# Altium PCB PCB_Irrigatore_01_2023-07-30.pcbdoc
Units mil, origin at the board's own origin, x right, y up, seen from the top; angles counter-clockwise.
Board outline 8461.35 x 7981.9 mil, 2 copper layers (Top Layer, Bottom Layer); 38 components, 53 nets, 248 pads, 0 vias.
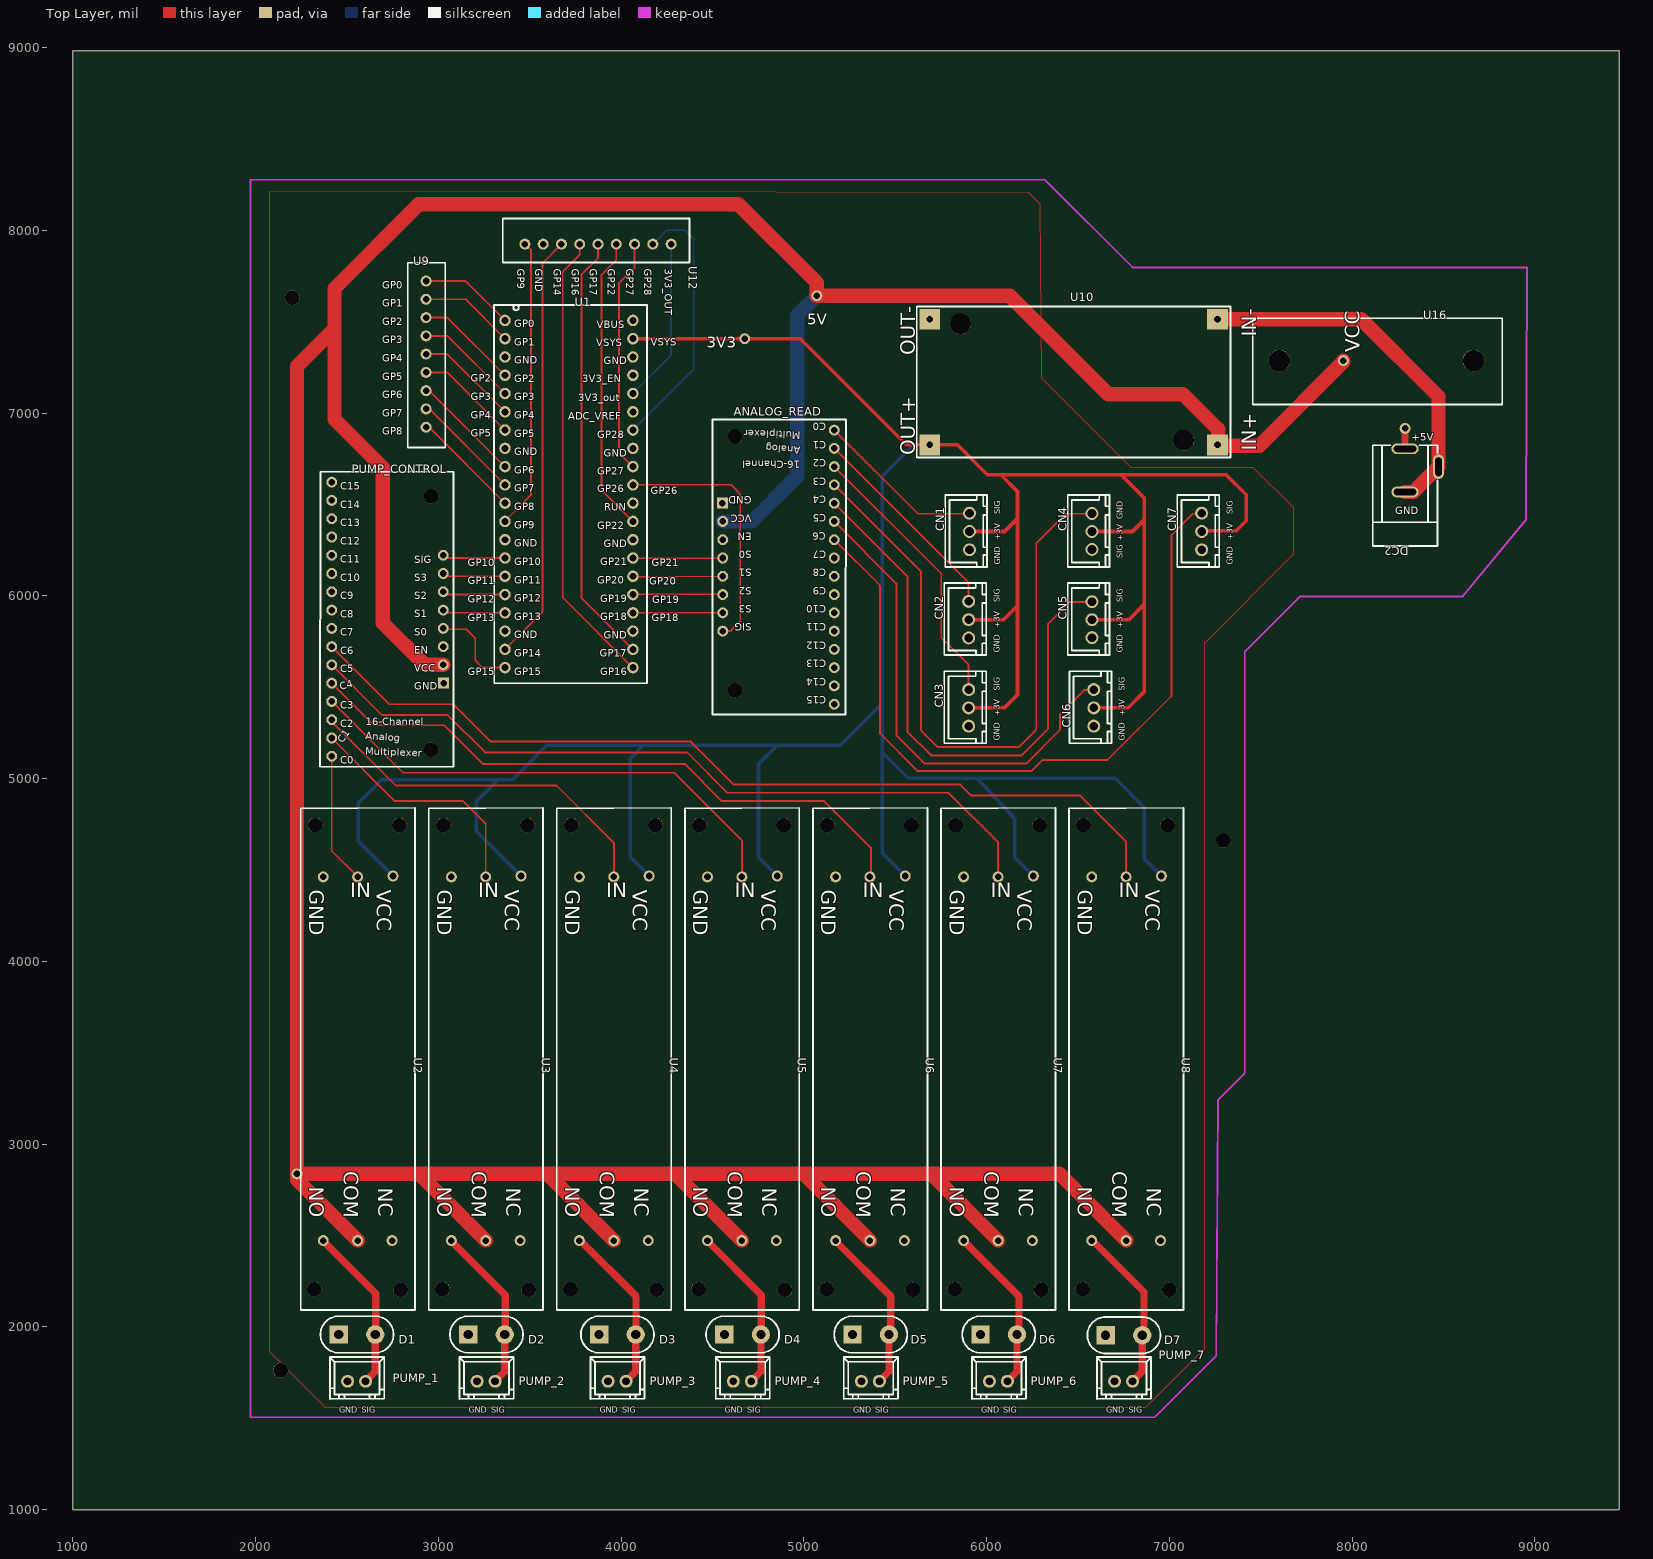
[diagram p0: Top Layer view]
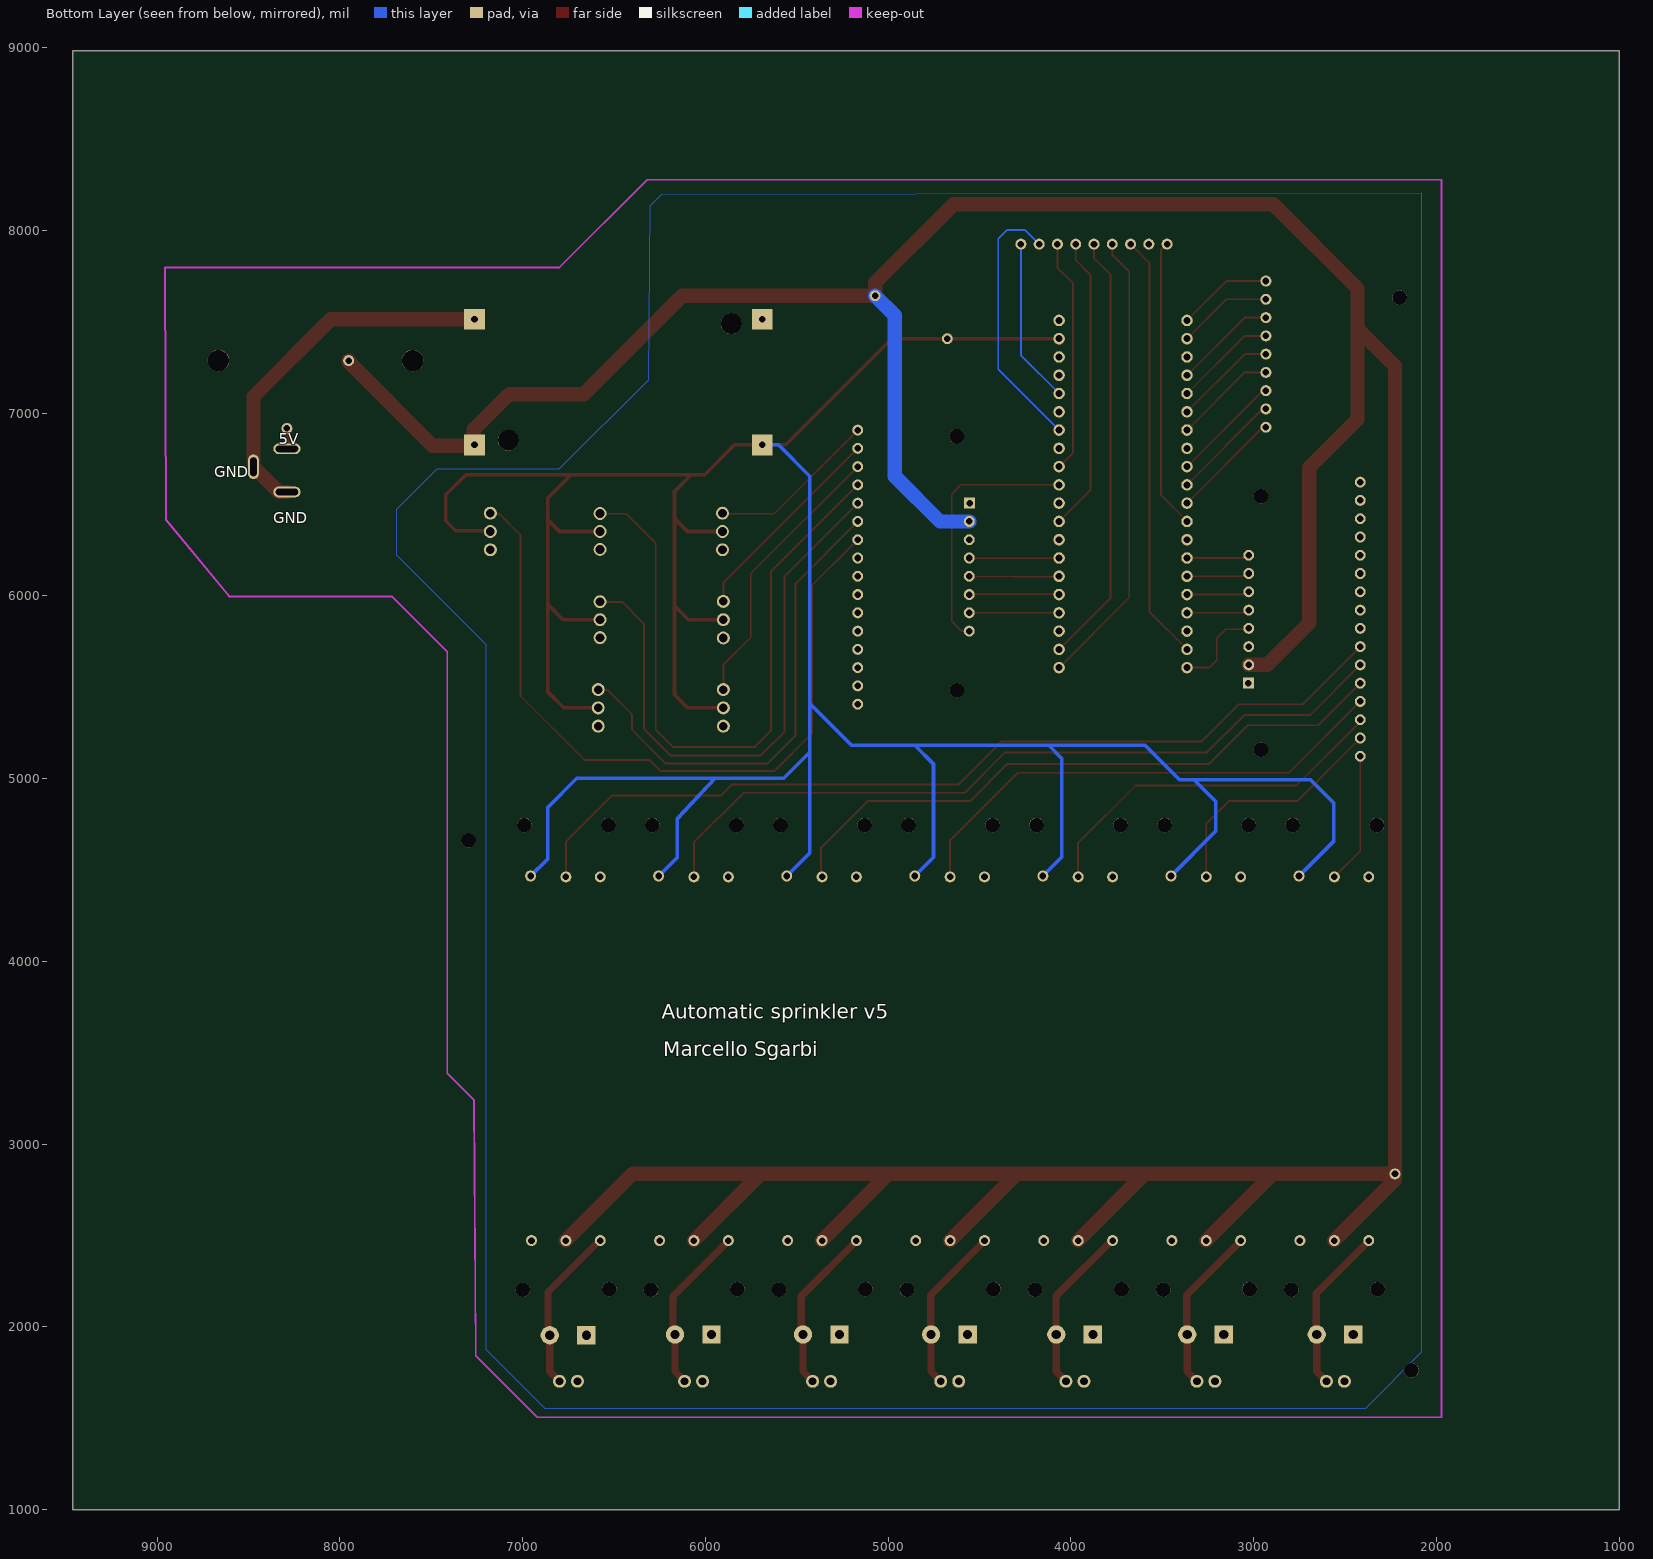
[diagram p1: Bottom Layer view, seen from below]

## Layer stack, top to bottom
Top Layer: signal copper (thickness not stored)
Dielectric: dielectric 12.6, FR-4, Dk 4.8
Bottom Layer: signal copper (thickness not stored)

## Board outline
9461.35,1000 1000,1000 1000,8981.9 9461.35,8981.9

## Components (designator, comment, footprint, x,y, rotation, side; value= is the part's Value field where it differs from the comment)
ANALOG_READ "16 - Cahnnel analog multiplexer" "16 CHANNEL ANANLOG MUX" 5166.65,5406.8 r180 top
CN1 "Signal_1" CONN-TH_XH-3A_2_54MM 5906.65,6351.8 r90 top
CN2 "Signal_2" CONN-TH_XH-3A_2_54MM 5901.65,5869.3 r90 top
CN3 "Signal_3" CONN-TH_XH-3A_2_54MM 5901.65,5386.8 r90 top
CN4 "Signal_4" CONN-TH_XH-3A 6576.65,6351.8 r90 top
CN5 "Signal_5" CONN-TH_XH-3A 6576.65,5869.3 r90 top
CN6 "Signal_6" CONN-TH_XH-3A_2_54MM 6586.65,5386.8 r90 top
CN7 "Signal_7" CONN-TH_XH-3A_2_54MM 7176.65,6351.8 r90 top
D1 "JP-DIODO-04" JP-DIODO-03 2554.75,1957.79 r180 top
D2 "JP-DIODO-04" JP-DIODO-03 3263.41,1957.79 r180 top
D3 "JP-DIODO-04" JP-DIODO-03 3979.95,1957.79 r180 top
D4 "JP-DIODO-04" JP-DIODO-03 4664.99,1957.79 r180 top
D5 "JP-DIODO-04" JP-DIODO-03 5365.77,1957.79 r180 top
D6 "JP-DIODO-04" JP-DIODO-03 6066.56,1957.79 r180 top
D7 "JP-DIODO-04" JP-DIODO-03 6751.6,1953.85 r180 top
DC2 "KH-DC-005B-2.0-Switch" DC-IN-TH_DC-005B-13A-SWITCH 8381.5,6686.1 r180 top
PUMP_1 "XH-2A_C9900014608" CONN-TH_XH-2A 2552.79,1701.88 r0 top
PUMP_2 "XH-2A_C9900014608" CONN-TH_XH-2A 3261.45,1701.88 r0 top
PUMP_3 "XH-2A_C9900014608" CONN-TH_XH-2A 3977.98,1701.88 r0 top
PUMP_4 "XH-2A_C9900014608" CONN-TH_XH-2A 4663.02,1701.88 r0 top
PUMP_5 "XH-2A_C9900014608" CONN-TH_XH-2A 5363.81,1701.88 r0 top
PUMP_6 "XH-2A_C9900014608" CONN-TH_XH-2A 6064.59,1701.88 r0 top
PUMP_7 "XH-2A_C9900014608" CONN-TH_XH-2A 6749.63,1701.88 r0 top
PUMP_CONTROL "16 - Cahnnel analog multiplexer" "16 CHANNEL ANANLOG MUX" 2416.65,6621.8 r0 top
U1 "RaspberryPI PicoW 2022" RASPERRYPI_PICOW_2022 3336.65,7506.8 r0 top
U2 "3V realy module" "3V MODULE FOOTPRINT" 2746.65,4461.8 r270 top
U3 "3V realy module" "3V MODULE FOOTPRINT" 3447.45,4461.8 r270 top
U4 "3V realy module" "3V MODULE FOOTPRINT" 4148.35,4461.8 r270 top
U5 "3V realy module" "3V MODULE FOOTPRINT" 4849.15,4461.8 r270 top
U6 "3V realy module" "3V MODULE FOOTPRINT" 5549.95,4461.8 r270 top
U7 "3V realy module" "3V MODULE FOOTPRINT" 6250.85,4461.8 r270 top
U8 "3V realy module" "3V MODULE FOOTPRINT" 6951.65,4461.8 r270 top
U9 "1x9_extra_pins" "GP0-GP8 1X9 EXTRA PINS" 2932.71,6922.35 r0 top
U10 "LM2596 Buck Converter" "LM2596 BUCK CONVERTER" 5688.65,7512.9 r0 top
U12 "1x9 extra right side" "1X9 FOOTPRINT RIGHT" 3452.39,8064.08 r270 top
U16 "Switch 3A 5V" "SWITCH 3A" 7601.65,7286.8 r0 top
? "" ? 1973.14,4892.82 r0 top
? "" ? 5464.2,8146 r0 top

## Footprints (in the part's own frame and the unit in brackets; to place one, negate y for a bottom-side part, rotate by r counter-clockwise, add the part's x,y. Pads: shape width x height; smd on the part's side, far side on the other; paste and mask are expansions set on the pad)
"1X9 FOOTPRINT RIGHT" [mil]
  round 60 hole 36 paste+0 mask+2: 10(140,21.25) 11(140,121.25) 12(140,221.25) 13(140,321.25) 14(140,421.25) 15(140,521.25) 16(140,621.25) 17(140,721.25) 18(140,821.25)
  silkscreen extent 0,-100 240,921
"3V MODULE FOOTPRINT" [mil]
  round 60 hole 36 paste+0 mask+2: 1(-5,5) 2(0,-188.19) 3(0,-376.38) 4(1989.88,-376.38) 5(1989.88,-188.19) 6(1989.88,0)
  round 80 hole 80 unplated paste+0: ""(-283.46,39.37) ""(-283.46,-421.26) ""(2255.9,-425.2) ""(2259.84,47.24)
  silkscreen extent -378,-500 2370,126
"16 CHANNEL ANANLOG MUX" [mil]
  round 60 hole 36 paste+0 mask+2: 1(0,0) 2(0,-100) 3(0,-200) 4(0,-300) 5(0,-400) 6(0,-500) 7(0,-600) 8(0,-700) 9(0,-800) 10(0,-900) 11(0,-1000) 12(0,-1100) 13(0,-1200) 14(0,-1300) 15(0,-1400) 16(0,-1500) 18(610.23,-1000) 19(610.23,-900) 20(610.23,-800) 21(610.23,-700) 22(610.23,-600) 23(610.23,-500) 24(610.23,-400)
  rect 60x60 hole 36 paste+0 mask+2: 17(612.23,-1100)
  round 80 hole 80 unplated paste+0: ""(543.31,-76.77) ""(543.31,-1464.56)
  silkscreen extent -63,-1557 667,57
CONN-TH_XH-2A [mm]
  round 1.8 hole 1.1 paste+0 mask+0.051: 1(-1.251,0) 2(1.251,0)
  silkscreen extent -3.69,-2.45 3.83,3.35
CONN-TH_XH-3A [mm]
  round 1.8 hole 1.2 paste+0 mask+0.05: 1(-2.5,0) 2(0,0) 3(2.5,0)
  silkscreen extent -4.92,-2.44 5.09,3.38
CONN-TH_XH-3A_2_54MM [mm]
  round 1.8 hole 1.2 paste+0 mask+0.05: 1(-2.54,0) 2(0,0) 3(2.54,0)
  silkscreen extent -4.92,-2.44 5.09,3.38
DC-IN-TH_DC-005B-13A-SWITCH [mm]
  oval 3.8x1.5 hole 0.9 slot 3.1 at 0 deg paste+0 mask+0.051: 1(2.325,-3.001) 2(2.325,2.999)
  oval 1.5x3.4 hole 0.9 slot 2.6 at 90 deg paste+0 mask+0.051: 3(-2.325,-0.5)
  round 1.524 hole 0.914 paste+0 mask+0.051: 4(2.325,-5.842)
  silkscreen extent -2.17,-3.5 6.83,10.5
"GP0-GP8 1X9 EXTRA PINS" [mil]
  round 60 hole 36 paste+0 mask+2: 1(0,800) 2(0,700) 3(0,600) 4(0,500) 5(0,400) 6(0,300) 7(0,200) 8(0,100) 9(0,0)
  silkscreen extent -100,-111 105,900
JP-DIODO-03 [mil]
  rect 100x100 hole 50 paste+0 mask+4: 1(100,0)
  round 100 hole 50 paste+0 mask+4: 2(-100,0)
  silkscreen extent -200,-100 200,100
"LM2596 BUCK CONVERTER" [mm]
  rect 2.9x2.9 hole 0.914 paste+0 mask+0.051: 1(40,-17.45) 2(40,0) 3(0,0) 4(0,-17.45)
  round 2.9 hole 2.9 unplated paste+0: ""(4.3,-0.6) ""(35.3,-16.8)
  silkscreen extent -1.8,-19.2 41.8,1.8
RASPERRYPI_PICOW_2022 [mm]
  round 1.6 hole 0.96 paste+0 mask+0.051: 1(0.71,0) 2(0.71,-2.54) 3(0.71,-5.08) 4(0.71,-7.62) 5(0.71,-10.16) 6(0.71,-12.7) 7(0.71,-15.24) 8(0.71,-17.78) 9(0.71,-20.32) 10(0.71,-22.86) 11(0.71,-25.4) 12(0.71,-27.94) 13(0.71,-30.48) 14(0.71,-33.02) 15(0.71,-35.56) 16(0.71,-38.1) 17(0.71,-40.64) 18(0.71,-43.18) 19(0.71,-45.72) 20(0.71,-48.26) 21(18.49,-48.26) 22(18.49,-45.72) 23(18.49,-43.18) 24(18.49,-40.64) 25(18.49,-38.1) 26(18.49,-35.56) 27(18.49,-33.02) 28(18.49,-30.48) 29(18.49,-27.94) 30(18.49,-25.4) 31(18.49,-22.86) 32(18.49,-20.32) 33(18.49,-17.78) 34(18.49,-15.24) 35(18.49,-12.7) 36(18.49,-10.16) 37(18.49,-7.62) 38(18.49,-5.08) 39(18.49,-2.54) 40(18.49,0)
  silkscreen extent -0.8,-50.44 20.47,2.16
"SWITCH 3A" [mm]
  round 1.524 hole 0.914 paste+0 mask+0.051: 1(8.9,0)
  round 3 hole 3 unplated paste+0: ""(0,0) ""(27,0)
  silkscreen extent -3.7,-6.1 31,5.9
? [mil]

## Free pads (board coordinates)
  round 60 hole 36 paste+0 mask+2: 2(5071.65,7641.8) 3(2226.65,2836.8) 4(4676.3,7406.8)
  round 80 hole 80 unplated paste+0: ""(2136.65,1761.8) ""(2200.43,7631.01) ""(7296.65,4661.8)

## Nets (pads, with @x,y where several pads share a name; then routed paths per layer and width w, separated by ;. In a path a pad name is that pad's centre, name@x,y a point inside that pad or via, vN(x,y) a via of type N, cw(c..) or ccw(c..) an arc to the next point about the centre after c; other vN are vias at no path point)
+3V3: CN1.2 CN2.2 CN3.2 CN4.2 CN5.2 CN6.2 CN7.2 pad.4 U1.39 U2.1 U3.1 U4.1 U5.1 U6.1 U7.1 U8.1 U10.4 | length 19480.3
  Top Layer w20: U1.39@4064.55,7406.8 pad.4 4979.75,7406.8 5560.65,6825.9 U10.4 ; U10.4 5840.18,6825.89 6003.57,6662.5 7310.65,6662.5 7420.89,6552.27 7420.89,6410.54 7365.77,6355.42 7180.28,6355.42 CN7.2 ; CN3.2 6097.93,5386.79 6168.92,5457.78 6168.92,6570.31 6076.73,6662.5 ; CN2.2 6092.24,5869.29 6168.92,5945.97 ; CN1.2 6097.7,6351.79 6168.92,6423.01 ; CN5.2 6779.23,5869.29 6861.83,5951.89 ; CN4.2 6798.57,6351.79 6861.83,6415.05 ; CN6.2 6775.09,5386.79 6861.83,5473.53 6861.83,6536.52 6735.85,6662.5
  Bottom Layer w20: U2.1 2562.63,4655.82 2562.63,4867.23 2688.61,4993.22 3405.15,4993.22 3594.12,5182.19 5200.42,5182.19 5428.76,5410.54 ; 3329.05,4993.2 3326.45,4993.2 3208.35,4875.1 3208.35,4711 U3.1 ; 4124.05,5182.2 4121.65,5182.2 4050.85,5111.3 4050.85,4569.3 U4.1 ; U5.1 4751.65,4569.3 4751.65,5079.8 4853.95,5182.2 4859.05,5182.2 ; 5428.75,5143.5 5571.25,5001.1 6704.35,5001.1 6861.85,4843.6 6861.85,4561.6 U8.1 ; U6.1 5428.76,4592.98 5428.76,5410.54 ; U10.4 5600.02,6825.89 5428.76,6654.63 5428.76,5410.54 ; 5947.05,5001.1 6153.15,4780.9 6153.15,4569.5 U7.1
+5V: ANALOG_READ.18 pad.2 pad.3 PUMP_CONTROL.18 U2.5 U3.5 U4.5 U5.5 U6.5 U7.5 U8.5 U10.1 U16.1 | length 22935
  Top Layer w78.74: 2431.65,7460.5 2226.65,7255.5 pad.3 ; U2.5 2226.65,2803.73 pad.3 ; 2897.79,2836.8 2897.79,2833.42 U3.5 ; PUMP_CONTROL.18@3026.85,5621.8 2926.15,5621.8 2696.65,5851.3 2696.65,6701.8 2431.65,6966.8 2431.65,7681.1 2893.35,8142.8 4641.35,8142.8 5071.65,7712.5 pad.2 6126.63,7641.8 6664.98,7103.45 7074.43,7103.45 7266.65,6911.23 7266.65,6821.8 7493.55,6821.8 7952.05,7280.3 U16.1 ; 3592.52,2836.8 3595.24,2836.8 U4.5@3960.12,2471.92 ; 4297.79,2836.8 4297.79,2835.09 U5.5 ; 4997.75,2836.8 U6.5@5361.75,2471.9 ; 5697.75,2836.8 U7.5@6062.65,2471.9 ; U8.5 6398.58,2836.8 pad.3
  Bottom Layer w78.74: ANALOG_READ.18 4716.35,6406.8 4964.25,6654.6 4964.25,7534.4 pad.2
+IN: DC2.1 DC2.4 | length 111.9
  Top Layer w39.37: DC2.1 DC2.4
GND: ANALOG_READ.17 ANALOG_READ.19 CN1.1 CN2.1 CN3.1 CN4.1 CN5.1 CN6.1 CN7.1 D1.1 D2.1 D3.1 D4.1 D5.1 D6.1 D7.1 PUMP_1.1 PUMP_2.1 PUMP_3.1 PUMP_4.1 PUMP_5.1 PUMP_6.1 PUMP_7.1 PUMP_CONTROL.17 PUMP_CONTROL.19 U1.38 U2.3 U3.3 U4.3 U5.3 U6.3 U7.3 U8.3 U10.3 U12.11
GND5: DC2.2 DC2.3 U10.2 | length 1978.8
  Top Layer w78.74: U10.2 8050.85,7512.9 8473.05,7090.7 DC2.3@8473.05,6736.6 ; DC2.2 8335.25,6568 DC2.3
NETPORT1: PUMP_CONTROL.24 U1.14 | length 343.9
  Top Layer w10: PUMP_CONTROL.24@3026.85,6221.8 3041.85,6206.8 U1.14@3364.55,6206.8
NETPORT2: PUMP_CONTROL.23 U1.15 | length 343.9
  Top Layer w10: PUMP_CONTROL.23 3041.88,6106.8 U1.15
NETPORT3: PUMP_CONTROL.22 U1.16 | length 343.9
  Top Layer w10: PUMP_CONTROL.22 3041.88,6006.8 U1.16
NETPORT4: PUMP_CONTROL.21 U1.17 | length 343.9
  Top Layer w10: PUMP_CONTROL.21 3041.88,5906.8 U1.17
NETPORT5: PUMP_CONTROL.20 U1.20 | length 497.1
  Top Layer w10: PUMP_CONTROL.20 3031.88,5816.8 3151.65,5816.8 3201.65,5766.8 3201.65,5646.8 3241.65,5606.8 U1.20
NETPORT6: ANALOG_READ.20 U1.27 | length 497.7
  Top Layer w10: U1.27@4058.69,6205.81 ANALOG_READ.20
NETPORT7: ANALOG_READ.21 U1.26 | length 489.9
  Top Layer w10: U1.26@4066.56,6103.45 ANALOG_READ.21
NETPORT8: ANALOG_READ.22 U1.25 | length 489.9
  Top Layer w10: U1.25@4066.56,6008.96 ANALOG_READ.22
NETPORT9: ANALOG_READ.23 U1.24 | length 489.9
  Top Layer w10: U1.24@4066.56,5906.6 ANALOG_READ.23
NETPORT10: ANALOG_READ.24 U1.31 | length 1418.8
  Top Layer w10: U1.31@4066.56,6607.39 4601.65,6606.8 4651.65,6556.8 4651.65,5861.8 4596.65,5806.8 ANALOG_READ.24
NETPORT11: PUMP_CONTROL.16 U2.2 | length 718.7
  Top Layer w10: PUMP_CONTROL.16 2416.65,4603.61 U2.2
NETPORT12: PUMP_CONTROL.15 U3.2 | length 1328.1
  Top Layer w10: PUMP_CONTROL.15 2761.65,4876.8 3135.75,4876.8 3259.25,4753.2 U3.2@3259.25,4461.8
NETPORT13: PUMP_CONTROL.14 U4.2 | length 2016.1
  Top Layer w10: PUMP_CONTROL.14 2416.65,5311.8 2766.65,4961.8 3646.65,4961.8 3961.65,4646.8 3961.65,4463.32 U4.2@3960.12,4461.8
NETPORT14: PUMP_CONTROL.13 U5.2 | length 2759.5
  Top Layer w10: PUMP_CONTROL.13 2806.65,5031.8 4291.65,5031.8 4660.96,4662.49 U5.2
NETPORT15: PUMP_CONTROL.12 U6.2 | length 3484.8
  Top Layer w10: PUMP_CONTROL.12 2646.65,5291.8 3031.65,5291.8 3243.65,5079.8 4348.65,5079.8 4551.65,4876.8 5111.65,4876.8 5366.65,4621.8 5366.65,4466.7 U6.2@5361.75,4461.8
NETPORT16: PUMP_CONTROL.11 U7.2 | length 4237.2
  Top Layer w10: PUMP_CONTROL.11 2691.65,5346.8 3051.65,5346.8 3255.65,5142.8 4360.65,5142.8 4581.15,4922.3 5791.05,4922.3 6062.65,4650.8 U7.2@6062.65,4461.8
NETPORT17: PUMP_CONTROL.10 U8.2 | length 4981.9
  Top Layer w10: PUMP_CONTROL.10 2731.65,5406.8 3081.65,5406.8 3286.65,5201.8 4381.65,5201.8 4616.65,4966.8 5856.65,4966.8 5916.65,4906.8 6511.65,4906.8 6763.46,4654.99 U8.2
NETPORT18: D1.2 PUMP_1.2 U2.4 | length 911.7
  Top Layer w39.37: U2.4 2370.27,2469.05 2657.12,2182.2 2657.12,1960.15 D1.2 2654.75,1754.6 PUMP_1.2
NETPORT19: D2.2 PUMP_2.2 U3.4 | length 914.9
  Top Layer w39.37: U3.4 3071.07,2469.03 3365.78,2174.32 3365.78,1960.15 D2.2 3363.41,1754.6 PUMP_2.2
NETPORT20: D3.2 PUMP_3.2 U4.4 | length 924.3
  Top Layer w39.37: U4.4 3776.84,2471.92 4082.31,2166.45 4082.31,1960.15 D3.2 4079.95,1754.6 PUMP_3.2
NETPORT21: D4.2 PUMP_4.2 U5.4 | length 914.9
  Top Layer w39.37: U5.4 4472.77,2468.91 4767.35,2174.32 4767.35,1960.15 D4.2 4764.99,1754.61 PUMP_4.2
NETPORT22: D5.2 PUMP_5.2 U6.4 | length 921.4
  Top Layer w39.37: U6.4 5173.57,2468.89 5476.01,2166.45 5476.01,1968.03 D5.2 5465.77,1754.6 PUMP_5.2
NETPORT23: D6.2 PUMP_6.2 U7.4 | length 921.3
  Top Layer w39.37: U7.4 5874.47,2468.78 6176.79,2166.45 6176.79,1968.03 D6.2 6166.56,1754.6 PUMP_6.2
NETPORT24: D7.2 PUMP_7.2 U8.4 | length 917.6
  Top Layer w39.37: U8.4 6579.98,2471.92 6861.83,2190.07 6861.83,1964.09 D7.2 6851.6,1754.6 PUMP_7.2
NETPORT25: ANALOG_READ.16 CN1.3 | length 929.8
  Top Layer w10: ANALOG_READ.16 5624.75,6448.7 CN1.3@5906.65,6448.7
NETPORT26: ANALOG_READ.15 CN2.3 | length 1145
  Top Layer w10: ANALOG_READ.15 5901.65,6071.8 CN2.3@5901.65,5966.2
NETPORT27: ANALOG_READ.14 CN3.3 | length 1527.5
  Top Layer w10: ANALOG_READ.14 5751.65,6121.8 5751.65,5771.8 5901.65,5621.8 CN3.3@5901.65,5483.7
NETPORT28: ANALOG_READ.13 CN4.3 | length 3640.4
  Top Layer w10: ANALOG_READ.13 5641.65,6131.8 5641.65,5261.8 5731.65,5171.8 6176.65,5171.8 6271.65,5266.8 6271.65,6286.8 6433.55,6448.7 CN4.3@6576.65,6448.7
NETPORT29: ANALOG_READ.12 CN5.3 | length 3164.1
  Top Layer w10: ANALOG_READ.12 5566.65,6106.8 5566.65,5256.8 5696.65,5126.8 6191.65,5126.8 6336.65,5271.8 6336.65,5846.8 6456.05,5966.2 CN5.3@6576.65,5966.2
NETPORT30: ANALOG_READ.11 CN6.3 | length 2671.3
  Top Layer w10: ANALOG_READ.11 5506.65,6066.8 5506.65,5236.8 5661.65,5081.8 6216.65,5081.8 6401.65,5266.8 6401.65,5351.8 6533.55,5483.7 CN6.3@6586.65,5483.7
NETPORT31: ANALOG_READ.10 CN7.3 | length 4106.7
  Top Layer w10: ANALOG_READ.10 5416.65,6056.8 5416.65,5246.8 5621.65,5041.8 6246.65,5041.8 6306.65,5101.8 6661.65,5101.8 7011.65,5451.8 7011.65,6331.8 7128.55,6448.7 CN7.3@7176.65,6448.7
NETPORT32: U1.1 U9.1 | length 521.2
  Top Layer w10: U9.1 3149.05,7722.35 U1.1
NETPORT33: U1.2 U9.2 | length 521.2
  Top Layer w10: U9.2 3149.05,7622.35 U1.2
NETPORT34: U1.4 U9.3 | length 562.6
  Top Layer w10: U9.3 3049.05,7522.35 U1.4
NETPORT35: U1.5 U9.4 | length 562.6
  Top Layer w10: U9.4 3049.05,7422.35 U1.5
NETPORT36: U1.6 U9.5 | length 562.6
  Top Layer w10: U9.5 3049.05,7322.35 U1.6
NETPORT37: U1.7 U9.6 | length 562.6
  Top Layer w10: U9.6 3049.05,7222.35 U1.7
NETPORT38: U1.9 U9.7 | length 604
  Top Layer w10: U9.7 2949.05,7122.35 U1.9
NETPORT39: U1.10 U9.8 | length 604
  Top Layer w10: U9.8 2949.05,7022.35 U1.10
NETPORT40: U1.11 U9.9 | length 604
  Top Layer w10: U9.9 2949.05,6922.35 U1.11
NETPORT41: U1.12 U12.10 | length 1590.5
  Top Layer w10: U1.12 3364.6,6409.36 3507.51,6552.27 3507.51,7890.21 U12.10
NETPORT42: U1.19 U12.12 | length 2345.3
  Top Layer w10: U1.19 3570.5,5912.7 3570.5,7820.94 U12.12
NETPORT43: U1.21 U12.13 | length 2514.8
  Top Layer w10: U12.13 3773.64,7865.64 3680.74,7772.74 3680.74,5990.66 U1.21
NETPORT44: U1.22 U12.14 | length 2371.4
  Top Layer w10: U12.14 3873.64,7847.53 3783.1,7756.99 3783.1,5988.3 U1.22
NETPORT45: U1.29 U12.15 | length 1621.5
  Top Layer w10: U12.15 3973.64,7837.3 3893.33,7756.99 3893.33,6578.06 U1.29
NETPORT46: U1.32 U12.16 | length 1284.6
  Top Layer w10: U1.32 3987.82,6783.57 3987.82,7709.75 4073.64,7795.56 U12.16
NETPORT47: U1.34 U12.17 | length 1459.9
  Bottom Layer w10: U1.34@4064.55,6906.8 4397.25,7239.5 4397.25,7953.8 4349.95,8001.1 4250.65,8001.1 U12.17
NETPORT48: U1.36 U12.18 | length 903.9
  Bottom Layer w10: U1.36 4273.64,7315.84 U12.18
pads on no net: ANALOG_READ. ANALOG_READ.1 ANALOG_READ.2 ANALOG_READ.3 ANALOG_READ.4 ANALOG_READ.5 ANALOG_READ.6 ANALOG_READ.7 ANALOG_READ.8 ANALOG_READ.9 PUMP_CONTROL. PUMP_CONTROL.1 PUMP_CONTROL.2 PUMP_CONTROL.3 PUMP_CONTROL.4 PUMP_CONTROL.5 PUMP_CONTROL.6 PUMP_CONTROL.7 PUMP_CONTROL.8 PUMP_CONTROL.9 U1.3 U1.8 U1.13 U1.18 U1.23 U1.28 U1.30 U1.33 U1.35 U1.37 U1.40 U2. U2.6 U3. U3.6 U4. U4.6 U5. U5.6 U6. U6.6 U7. U7.6 U8. U8.6 U10. U16.

## Polygon pours and split planes (outlines as drawn)
GND on Bottom Layer (solid): 2082.31,8205.81 2082.31,1859.36 2389.4,1552.28 6877.58,1552.28 7200.41,1875.11 7200.41,5733.37 7688.6,6221.56 7688.6,6473.53 7468.13,6694 6798.84,6694 6310.65,7182.19 6302.78,8134.94 6239.79,8197.93
GND on Top Layer (solid): 2074.44,8213.68 2074.44,1867.24 2381.53,1560.15 6869.71,1560.15 7192.54,1882.99 7192.54,5741.25 7680.73,6229.43 7680.73,6481.4 7460.26,6701.87 6790.97,6701.87 6302.78,7190.06 6294.9,8142.82 6231.91,8205.81

## Silkscreen, mask and mechanical layers (free items; w line width, h text height)
Top Overlay:
  text "5V" at 5019.32,7483.37 h59.05
  text "VSYS" at 4161.05,7367.23 h39.37
  text "3V3" at 4468.14,7357.38 h59.05
  text "GP2" at 3176.8,7170.38 h39.37
  text "GP3" at 3176.74,7070.24 h39.37
  text "GP4" at 3176.79,6970.1 h39.37
  text "GP5" at 3176.74,6869.97 h39.37
  text "+5V" at 8326.4,6847.55 h39.37
  text "GP26" at 4161.05,6556.2 h39.37
  text "GND" at 8235.86,6445.97 h39.37
  text "GP10" at 3161.06,6162.51 h39.37
  text "GP21" at 4168.93,6162.51 h39.37
  text "GP11" at 3161.11,6062.28 h39.37
  text "GP20" at 4152.79,6059.76 h39.37
  text "GP12" at 3161.04,5962.1 h39.37
  text "GP19" at 4170.5,5959.36 h39.37
  text "GP13" at 3161.04,5861.85 h39.37
  text "GP18" at 4168.93,5860.94 h39.37
  text "GP15" at 3161.06,5564.09 h39.37
Bottom Overlay:
  text "5V" at 8334.27,6829.82 h59.05
  text "GND" at 8688.6,6648.72 h59.05
  text "GND" at 8365.77,6396.75 h59.05
  text "Automatic sprinkler v5" at 6239.79,3685.5 h80
  text "Marcello Sgarbi" at 6231.92,3480.78 h80

## Text inside footprints (layer, text, board x,y; h text height)
ANALOG_READ: Top Overlay "16-Channel" at 4981.61,6738.3 h39.37 r180; Top Overlay "Analog" at 4982.98,6814.68 h39.37 r176; Top Overlay "Multiplexer" at 4982.29,6898.12 h39.37 r178; Top Overlay "C15" at 5121.36,5448.93 h39.37 r180; Top Overlay "C14" at 5121.32,5548.74 h39.37 r180; Top Overlay "C13" at 5121.32,5648.65 h39.37 r180; Top Overlay "C12" at 5121.32,5748.47 h39.37 r180; Top Overlay "C11" at 5121.35,5848.4 h39.37 r180; Top Overlay "C10" at 5121.32,5948.26 h39.37 r180; Top Overlay "C9" at 5121.38,6048.03 h39.37 r180; Top Overlay "C8" at 5121.34,6147.82 h39.37 r180; Top Overlay "C7" at 5121.39,6247.66 h39.37 r180; Top Overlay "C6" at 5120.63,6347.41 h39.37 r182; Top Overlay "C5" at 5121.31,6447.26 h39.37 r180; Top Overlay "C4" at 5121.33,6547.1 h39.37 r180; Top Overlay "C3" at 5121.37,6646.91 h39.37 r180; Top Overlay "C2" at 5121.37,6746.77 h39.37 r180; Top Overlay "C1" at 5121.4,6846.7 h39.37 r180; Top Overlay "C0" at 5121.33,6946.56 h39.37 r180; Top Overlay "SIG" at 4715.88,5849.31 h39.37 r180; Top Overlay "S3" at 4715.88,5948.52 h39.37 r180; Top Overlay "S2" at 4715.83,6047.78 h39.37 r180; Top Overlay "S1" at 4715.89,6146.97 h39.37 r180; Top Overlay "S0" at 4715.85,6246.22 h39.37 r180; Top Overlay "EN" at 4715.83,6345.44 h39.37 r180; Top Overlay "VCC" at 4715.88,6444.65 h39.37 r180; Top Overlay "GND" at 4715.86,6543.81 h39.37 r180
CN1: Top Overlay "+3V" at 6075.94,6304.91 h31.5 r90; Top Overlay "GND" at 6075.92,6170.69 h31.5 r90; Top Overlay "SIG" at 6075.94,6446.28 h31.5 r90
CN2: Top Overlay "+3V" at 6070.94,5822.41 h31.5 r90; Top Overlay "GND" at 6070.92,5688.19 h31.5 r90; Top Overlay "SIG" at 6070.94,5963.78 h31.5 r90
CN3: Top Overlay "+3V" at 6070.94,5339.91 h31.5 r90; Top Overlay "GND" at 6070.92,5205.69 h31.5 r90; Top Overlay "SIG" at 6070.94,5481.28 h31.5 r90
CN4: Top Overlay "+3V" at 6745.94,6298.8 h31.5 r90; Top Overlay "GND" at 6745.92,6418.72 h31.5 r90; Top Overlay "SIG" at 6745.94,6206.13 h31.5 r90
CN5: Top Overlay "+3V" at 6745.94,5822.41 h31.5 r90; Top Overlay "GND" at 6745.92,5688.19 h31.5 r90; Top Overlay "SIG" at 6745.94,5963.78 h31.5 r90
CN6: Top Overlay "+3V" at 6755.94,5339.91 h31.5 r90; Top Overlay "GND" at 6755.92,5205.69 h31.5 r90; Top Overlay "SIG" at 6755.94,5481.28 h31.5 r90
CN7: Top Overlay "+3V" at 7345.94,6304.91 h31.5 r90; Top Overlay "GND" at 7345.92,6170.69 h31.5 r90; Top Overlay "SIG" at 7345.94,6446.28 h31.5 r90
PUMP_1: Top Overlay "GND" at 2458.3,1528.63 h31.5; Top Overlay "SIG" at 2580.35,1528.65 h31.5
PUMP_2: Top Overlay "GND" at 3166.96,1528.63 h31.5; Top Overlay "SIG" at 3289.01,1528.65 h31.5
PUMP_3: Top Overlay "GND" at 3883.49,1528.63 h31.5; Top Overlay "SIG" at 4005.54,1528.65 h31.5
PUMP_4: Top Overlay "GND" at 4568.53,1528.63 h31.5; Top Overlay "SIG" at 4690.58,1528.65 h31.5
PUMP_5: Top Overlay "GND" at 5269.32,1528.63 h31.5; Top Overlay "SIG" at 5391.37,1528.65 h31.5
PUMP_6: Top Overlay "GND" at 5970.11,1528.63 h31.5; Top Overlay "SIG" at 6092.16,1528.65 h31.5
PUMP_7: Top Overlay "GND" at 6655.14,1528.63 h31.5; Top Overlay "SIG" at 6777.19,1528.65 h31.5
PUMP_CONTROL: Top Overlay "16-Channel" at 2601.69,5290.31 h39.37; Top Overlay "Analog" at 2600.31,5213.92 h39.37 r356; Top Overlay "Multiplexer" at 2601,5130.48 h39.37 r358; Top Overlay "C15" at 2461.94,6579.68 h39.37; Top Overlay "C14" at 2461.98,6479.85 h39.37; Top Overlay "C13" at 2461.98,6379.95 h39.37; Top Overlay "C12" at 2461.98,6280.14 h39.37; Top Overlay "C11" at 2461.95,6180.2 h39.37; Top Overlay "C10" at 2461.98,6080.35 h39.37; Top Overlay "C9" at 2461.92,5980.56 h39.37; Top Overlay "C8" at 2461.96,5880.77 h39.37; Top Overlay "C7" at 2461.91,5780.94 h39.37; Top Overlay "C6" at 2461.98,5681.18 h39.37; Top Overlay "C5" at 2461.99,5581.35 h39.37; Top Overlay "C4" at 2467.06,5482.18 h39.37 r15; Top Overlay "C3" at 2461.93,5381.69 h39.37; Top Overlay "C2" at 2461.93,5281.84 h39.37; Top Overlay "C1" at 2478.02,5190.29 h39.37 r55; Top Overlay "C0" at 2461.97,5082.03 h39.37; Top Overlay "SIG" at 2867.42,6179.28 h39.37; Top Overlay "S3" at 2867.42,6080.07 h39.37; Top Overlay "S2" at 2867.47,5980.81 h39.37; Top Overlay "S1" at 2867.41,5881.64 h39.37; Top Overlay "S0" at 2867.45,5782.39 h39.37; Top Overlay "EN" at 2867.47,5683.16 h39.37; Top Overlay "VCC" at 2867.42,5583.95 h39.37; Top Overlay "GND" at 2867.44,5484.8 h39.37
U1: Top Overlay "GP0" at 3416.54,7469.8 h39.37; Top Overlay "GP1" at 3416.55,7369.52 h39.37; Top Overlay "GND" at 3416.57,7269.34 h39.37; Top Overlay "GP2" at 3416.58,7169.19 h39.37; Top Overlay "GP3" at 3416.52,7069.06 h39.37; Top Overlay "GP4" at 3416.57,6968.91 h39.37; Top Overlay "GP5" at 3416.52,6868.78 h39.37; Top Overlay "GND" at 3416.52,6768.56 h39.37; Top Overlay "GP6" at 3416.56,6668.36 h39.37; Top Overlay "GP7" at 3416.57,6568.12 h39.37; Top Overlay "GP8" at 3416.5,6467.82 h39.37; Top Overlay "GP9" at 3416.59,6367.64 h39.37; Top Overlay "GND" at 3416.52,6267.41 h39.37; Top Overlay "GP10" at 3416.52,6167.27 h39.37; Top Overlay "GP11" at 3416.57,6067.06 h39.37; Top Overlay "GP12" at 3416.5,5966.88 h39.37; Top Overlay "GP13" at 3416.5,5866.61 h39.37; Top Overlay "GND" at 3416.51,5766.4 h39.37; Top Overlay "GP14" at 3416.59,5666.1 h39.37; Top Overlay "GP15" at 3416.55,5565.85 h39.37; Top Overlay "GP16" at 3886.3,5563.89 h39.37; Top Overlay "GP17" at 3884.29,5666.65 h39.37; Top Overlay "GND" at 3905.15,5765.47 h39.37; Top Overlay "GP18" at 3884.68,5866.65 h39.37; Top Overlay "GP19" at 3886.25,5965.07 h39.37; Top Overlay "GP20" at 3868.54,6065.47 h39.37; Top Overlay "GP21" at 3884.68,6168.22 h39.37; Top Overlay "GND" at 3905.15,6265.85 h39.37; Top Overlay "GP22" at 3868.54,6364.68 h39.37; Top Overlay "RUN" at 3907.12,6465.85 h39.37; Top Overlay "GP26" at 3870.11,6566.26 h39.37; Top Overlay "GP27" at 3868.54,6662.7 h39.37; Top Overlay "GND" at 3905.15,6761.91 h39.37; Top Overlay "GP28" at 3868.54,6863.1 h39.37; Top Overlay "ADC_VREF" at 3710.27,6963.89 h39.37; Top Overlay "3V3_out" at 3766.57,7064.68 h39.37; Top Overlay "3V3_EN" at 3787.46,7169.72 h39.37; Top Overlay "GND" at 3905.27,7267.8 h39.37; Top Overlay "VSYS" at 3862.96,7365.84 h39.37; Top Overlay "VBUS" at 3866.57,7463.89 h39.37
U2: Top Overlay "VCC" at 2663.34,4390.93 h80 r270; Top Overlay "IN" at 2518.33,4350.9 h80; Top Overlay "GND" at 2293.26,4390.92 h80 r270; Top Overlay "NC" at 2671.22,2762.13 h80 r270; Top Overlay "COM" at 2482.23,2851.57 h80 r270; Top Overlay "NO" at 2293.26,2765.83 h80 r270
U3: Top Overlay "VCC" at 3364.14,4390.93 h80 r270; Top Overlay "IN" at 3219.13,4350.9 h80; Top Overlay "GND" at 2994.06,4390.92 h80 r270; Top Overlay "NC" at 3372.02,2762.13 h80 r270; Top Overlay "COM" at 3183.03,2851.57 h80 r270; Top Overlay "NO" at 2994.06,2765.83 h80 r270
U4: Top Overlay "VCC" at 4065.04,4390.93 h80 r270; Top Overlay "IN" at 3920.03,4350.9 h80; Top Overlay "GND" at 3694.96,4390.92 h80 r270; Top Overlay "NC" at 4072.92,2762.13 h80 r270; Top Overlay "COM" at 3883.93,2851.57 h80 r270; Top Overlay "NO" at 3694.96,2765.83 h80 r270
U5: Top Overlay "VCC" at 4765.84,4390.93 h80 r270; Top Overlay "IN" at 4620.83,4350.9 h80; Top Overlay "GND" at 4395.76,4390.92 h80 r270; Top Overlay "NC" at 4773.72,2762.13 h80 r270; Top Overlay "COM" at 4584.73,2851.57 h80 r270; Top Overlay "NO" at 4395.76,2765.83 h80 r270
U6: Top Overlay "VCC" at 5466.64,4390.93 h80 r270; Top Overlay "IN" at 5321.63,4350.9 h80; Top Overlay "GND" at 5096.56,4390.92 h80 r270; Top Overlay "NC" at 5474.52,2762.13 h80 r270; Top Overlay "COM" at 5285.53,2851.57 h80 r270; Top Overlay "NO" at 5096.56,2765.83 h80 r270
U7: Top Overlay "VCC" at 6167.54,4390.93 h80 r270; Top Overlay "IN" at 6022.53,4350.9 h80; Top Overlay "GND" at 5797.46,4390.92 h80 r270; Top Overlay "NC" at 6175.42,2762.13 h80 r270; Top Overlay "COM" at 5986.43,2851.57 h80 r270; Top Overlay "NO" at 5797.46,2765.83 h80 r270
U8: Top Overlay "VCC" at 6868.34,4390.93 h80 r270; Top Overlay "IN" at 6723.33,4350.9 h80; Top Overlay "GND" at 6498.26,4390.92 h80 r270; Top Overlay "NC" at 6876.22,2762.13 h80 r270; Top Overlay "COM" at 6687.23,2851.57 h80 r270; Top Overlay "NO" at 6498.26,2765.83 h80 r270
U9: Top Overlay "GP8" at 2692.71,6880.16 h39.37; Top Overlay "GP7" at 2692.71,6980.32 h39.37; Top Overlay "GP6" at 2692.71,7080.48 h39.37; Top Overlay "GP5" at 2692.71,7180.64 h39.37; Top Overlay "GP4" at 2692.71,7280.78 h39.37; Top Overlay "GP3" at 2692.71,7380.94 h39.37; Top Overlay "GP2" at 2692.71,7481.1 h39.37; Top Overlay "GP1" at 2692.71,7581.26 h39.37; Top Overlay "GP0" at 2692.71,7681.41 h39.37
U10: Top Overlay "IN+" at 7476.71,6792.43 h80 r90; Top Overlay "IN-" at 7476.68,7418.41 h80 r90; Top Overlay "OUT+" at 5608.55,6768.81 h80 r90; Top Overlay "OUT-" at 5608.59,7316.05 h80 r90
U12: Top Overlay "3V3_OUT" at 4238.95,7789.08 h39.37 r270; Top Overlay "GP28" at 4127.07,7789.08 h39.37 r270; Top Overlay "GP27" at 4027.7,7789.08 h39.37 r270; Top Overlay "GP22" at 3928.32,7789.08 h39.37 r270; Top Overlay "GP17" at 3828.95,7789.08 h39.37 r270; Top Overlay "GP16" at 3729.57,7789.08 h39.37 r270; Top Overlay "GP14" at 3630.2,7789.08 h39.37 r270; Top Overlay "GND" at 3530.82,7789.08 h39.37 r270; Top Overlay "GP9" at 3431.45,7789.08 h39.37 r270
U16: Top Overlay "VCC" at 8043.22,7333.78 h80 r90